# Altium PCB dtb220-schematic.PcbDoc
Units mil, origin at the board's own origin, x right, y up, seen from the top; angles counter-clockwise.
Board outline 6025 x 600 mil, 2 copper layers (Top Layer, Bottom Layer), stack 61.2 mil thick; 4 components, 2 nets, 15 pads, 0 vias.
Unrouted connection lines stored in the file: 1.
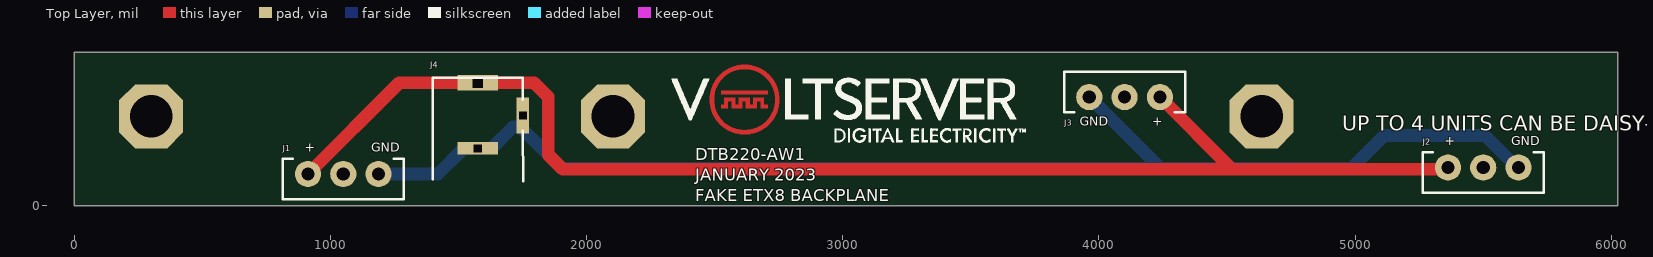
[diagram p0: Top Layer view]
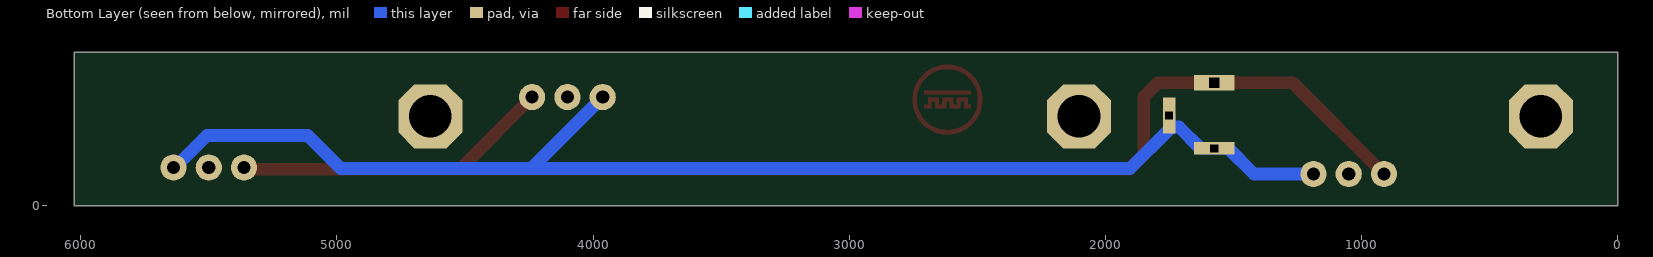
[diagram p1: Bottom Layer view, seen from below]
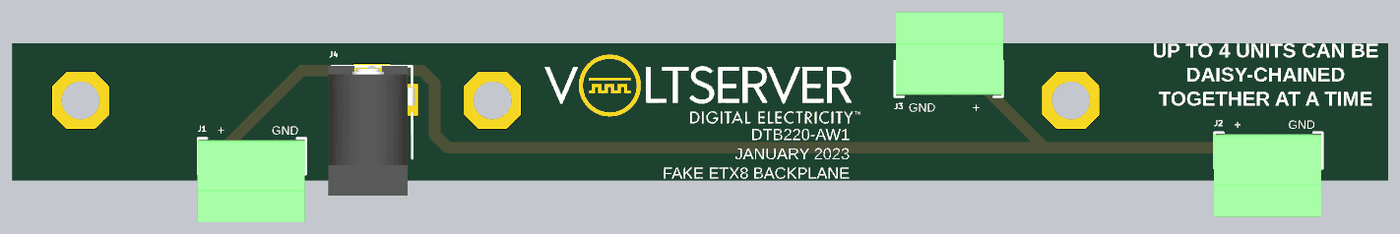
[diagram p2: 3D render of the assembled board from above, using the file's embedded part models]

## Layer stack, top to bottom
Top Solder: solder mask 0.4, Solder Resist, Dk 3.5
Top Layer: signal copper 1.4
Dielectric 1: dielectric 58.4, FR-4, Dk 4.8
Bottom Layer: signal copper 1.4
Bottom Solder: solder mask 0.4, Solder Resist, Dk 3.5

## Board outline
0,0 0,600 6025,600 6025,0

## Design rules (kind name [scope] priority, off if disabled: settings)
Clearance [All] p1: gap=10 ignorepadtopadclearanceinfootprint=FALSE except(0: Arc-Hole Track-Hole SMDPad-Hole THPad-Hole Via-Hole Fill-Hole Poly-Hole Region-Hole Text-Hole)
HoleSize [All] p1: absolutevalues=TRUE maxlimit=200 minlimit=1 maxpercent=80.000 minpercent=20.000
PolygonConnect [All] p1: connectstyle=Relief reliefconductorwidth=10 reliefentries=4 polygonreliefangle="90 Angle" airgapwidth=10
RoutingVias [All] p1: holewidth=28 width=50 viastyle="Through Hole" minholewidth=28 minwidth=50 maxholewidth=28 maxwidth=50
SilkToSolderMaskClearance [IsPad] p1: minsilkscreentomaskgap=0 clearancetoexposedcopper=TRUE
SolderMaskExpansion [All] p1: expansion=4 istentingtop=FALSE
Width [All] p1: maxlimit=50 minlimit=50 preferedwidth=50
28 further rules are at their usual default settings.

## Components (designator, comment, footprint, x,y, rotation, side; value= is the part's Value field where it differs from the comment)
J1 "1844223" 1844223 1050,125 r0 top locked
J2 "1844223" 1844223 5500,150 r0 top locked
J3 "1844223" 1844223 4100,425 r180 top
J4 "EJ508A" EJ508A 1575,353 r0 top

## Footprints (in the part's own frame and the unit in brackets; to place one, negate y for a bottom-side part, rotate by r counter-clockwise, add the part's x,y. Pads: shape width x height; smd on the part's side, far side on the other; paste and mask are expansions set on the pad)
1844223 [mm]
  round 2.6 hole 1.3: 1(-3.5,0) 2(0,0) 3(3.5,0)
  silkscreen extent -6,-2.5 6,1.5, body extent -6.05,-7.9 5.85,1.3, height 7.25
EJ508A [mm]
  rect 4.06x1.52 hole 1.02 square: 1(0,3.251)
  rect 4.06x1.26 hole 0.76 square: 2(0,-3.251)
  rect 1.26x3.55 hole 0.76 square: 3(4.47,0)
  silkscreen extent -4.47,-6.53 4.5,3.73, body extent -4.83,-10.67 4.72,3.75, height 11.15

## Part data
J1 J2 J3: "3 Position Terminal Block Header, Male Pins, Shrouded (4 Side) 0.138\" (3.50mm) 90°, Right Angle Through Hole", Manufacturer="Phoenix Contact", VoltServer PN=CON-00009, Manufacturer PN=1844223, Vendor=Digikey, Vendor PN=277-2415-ND
J4: "CONN PWR JACK 2.1X5.5MM SOLDER", Manufacturer=MPD, Manufacturer PN=EJ508A, Vendor=Digikey, Vendor PN=EJ508A-ND

## Free pads (board coordinates)
  oct 250x250 hole 166: ""(300,350) ""(2103,350) ""(4635,350)

## Nets (pads, with @x,y where several pads share a name; then routed paths per layer and width w, separated by ;. In a path a pad name is that pad's centre, name@x,y a point inside that pad or via, vN(x,y) a via of type N, cw(c..) or ccw(c..) an arc to the next point about the centre after c; other vN are vias at no path point)
5V: J1.1 J2.1 J3.1 J4.1 | length 5270.4
  Top Layer w50: J1.1 1268.2,480.99 J4.1 1794.01,480.99 1850,425 1850,200 1906.76,143.24 4519.55,143.24 ; J3.1 4519.55,143.24 ; J2.1 5355.45,143.24 4519.55,143.24
GND: J1.3 J2.3 J3.3 J4.2 J4.3 | length 5143.3
  Bottom Layer w50: J1.3 1420.28,125 1520.28,225 J4.2 1629.72,225 1712.84,308.12 1750.8,308.12 J4.3@1751,308.31 ; J4.3 1751,299 1904.09,145.91 4241.29,145.91 ; J3.3 4241.29,145.91 ; J2.3 5632.32,150 5507.32,275 5113.98,275 4984.89,145.91 4241.29,145.91
pads on no net: J1.2 J2.2 J3.2

## Other copper
Top Layer:
  region: 2679.07,384.43 2679.07,408.15 2678.45,408.15 2678.45,408.77 2664.09,408.77 2664.09,380.68 2621.65,380.68 2621.65,408.77 2608.54,408.77 2608.54,408.15 2607.92,408.15 2607.92,380.68 2566.1,380.68 2566.1,408.15 2565.47,408.15 2565.47,408.77 2552.37,408.77 2552.37,408.15 2551.74,408.15 2551.74,380.68 2524.9,380.68 2524.9,393.17 2525.53,393.17 2525.53,393.79 2526.15,393.79 2526.15,394.42 2538.01,394.42 2538.01,422.5 2579.83,422.5 2579.83,394.42 2593.56,394.42 2593.56,395.04 2594.19,395.04 2594.19,420.01 2593.56,420.01 2593.56,420.63 2594.19,420.63 2594.19,421.26 2594.81,421.26 2594.81,422.5 2636.01,422.5 2636.01,394.42 2650.99,394.42 2650.99,395.04 2650.36,395.04 2650.36,395.66 2649.74,395.66 2649.74,396.29 2650.36,396.29 2650.36,396.91 2650.99,396.91 2650.99,419.38 2650.36,419.38 2650.36,420.01 2649.74,420.01 2649.74,421.26 2650.36,421.26 2650.36,421.88 2650.99,421.88 2650.99,422.5 2691.56,422.5 2691.56,395.04 2692.18,395.04 2692.18,394.42 2707.79,394.42 2707.79,380.68 2679.07,380.68 2679.07,381.31 2678.45,381.31 2678.45,381.93 2679.07,381.93 2679.07,383.8
  region: 2662.22,450.59 2707.79,450.59 2707.79,436.86 2707.16,436.86 2707.16,436.24 2525.53,436.24 2525.53,436.86 2524.9,436.86 2524.9,450.59 2661.6,450.59
  region: 1005 vertices and 1 holes, not listed, extent 2481.21,279.57 2751.48,550.46

## Silkscreen, mask and mechanical layers (free items; w line width, h text height)
Top Overlay:
  drawing of 29 lines, arcs and shapes, not listed
  text "GND           +" at 3925,300.67 h60
  text "UP TO 4 UNITS CAN BE DAISY-CHAINED TOGETHER AT A TIME" at 4950,275 h100
  text "+              GND" at 5350,225.67 h60
  text "+              GND" at 900,200.67 h60
  text "DTB220-AW1 / JANUARY 2023 / FAKE ETX8 BACKPLANE" at 2425,2.35 h80
Top Solder:
  drawing of 3 lines, arcs and shapes, not listed
Mechanical 1:
  the board outline again, w10